# Altium PCB AWT25-000093_ZIM1.PcbDoc (part 4 of 4)
Units mm, origin at the board's own origin, x right, y up, seen from the top; angles counter-clockwise.
Board outline 210 x 108 mm, 6 copper layers (Top Layer, Mid-Layer 1, Internal Plane 2, Power, Mid-Layer 2, Bottom Layer); 303 components, 298 nets, 1319 pads, 1113 vias.
Unrouted connection lines stored in the file: 85.
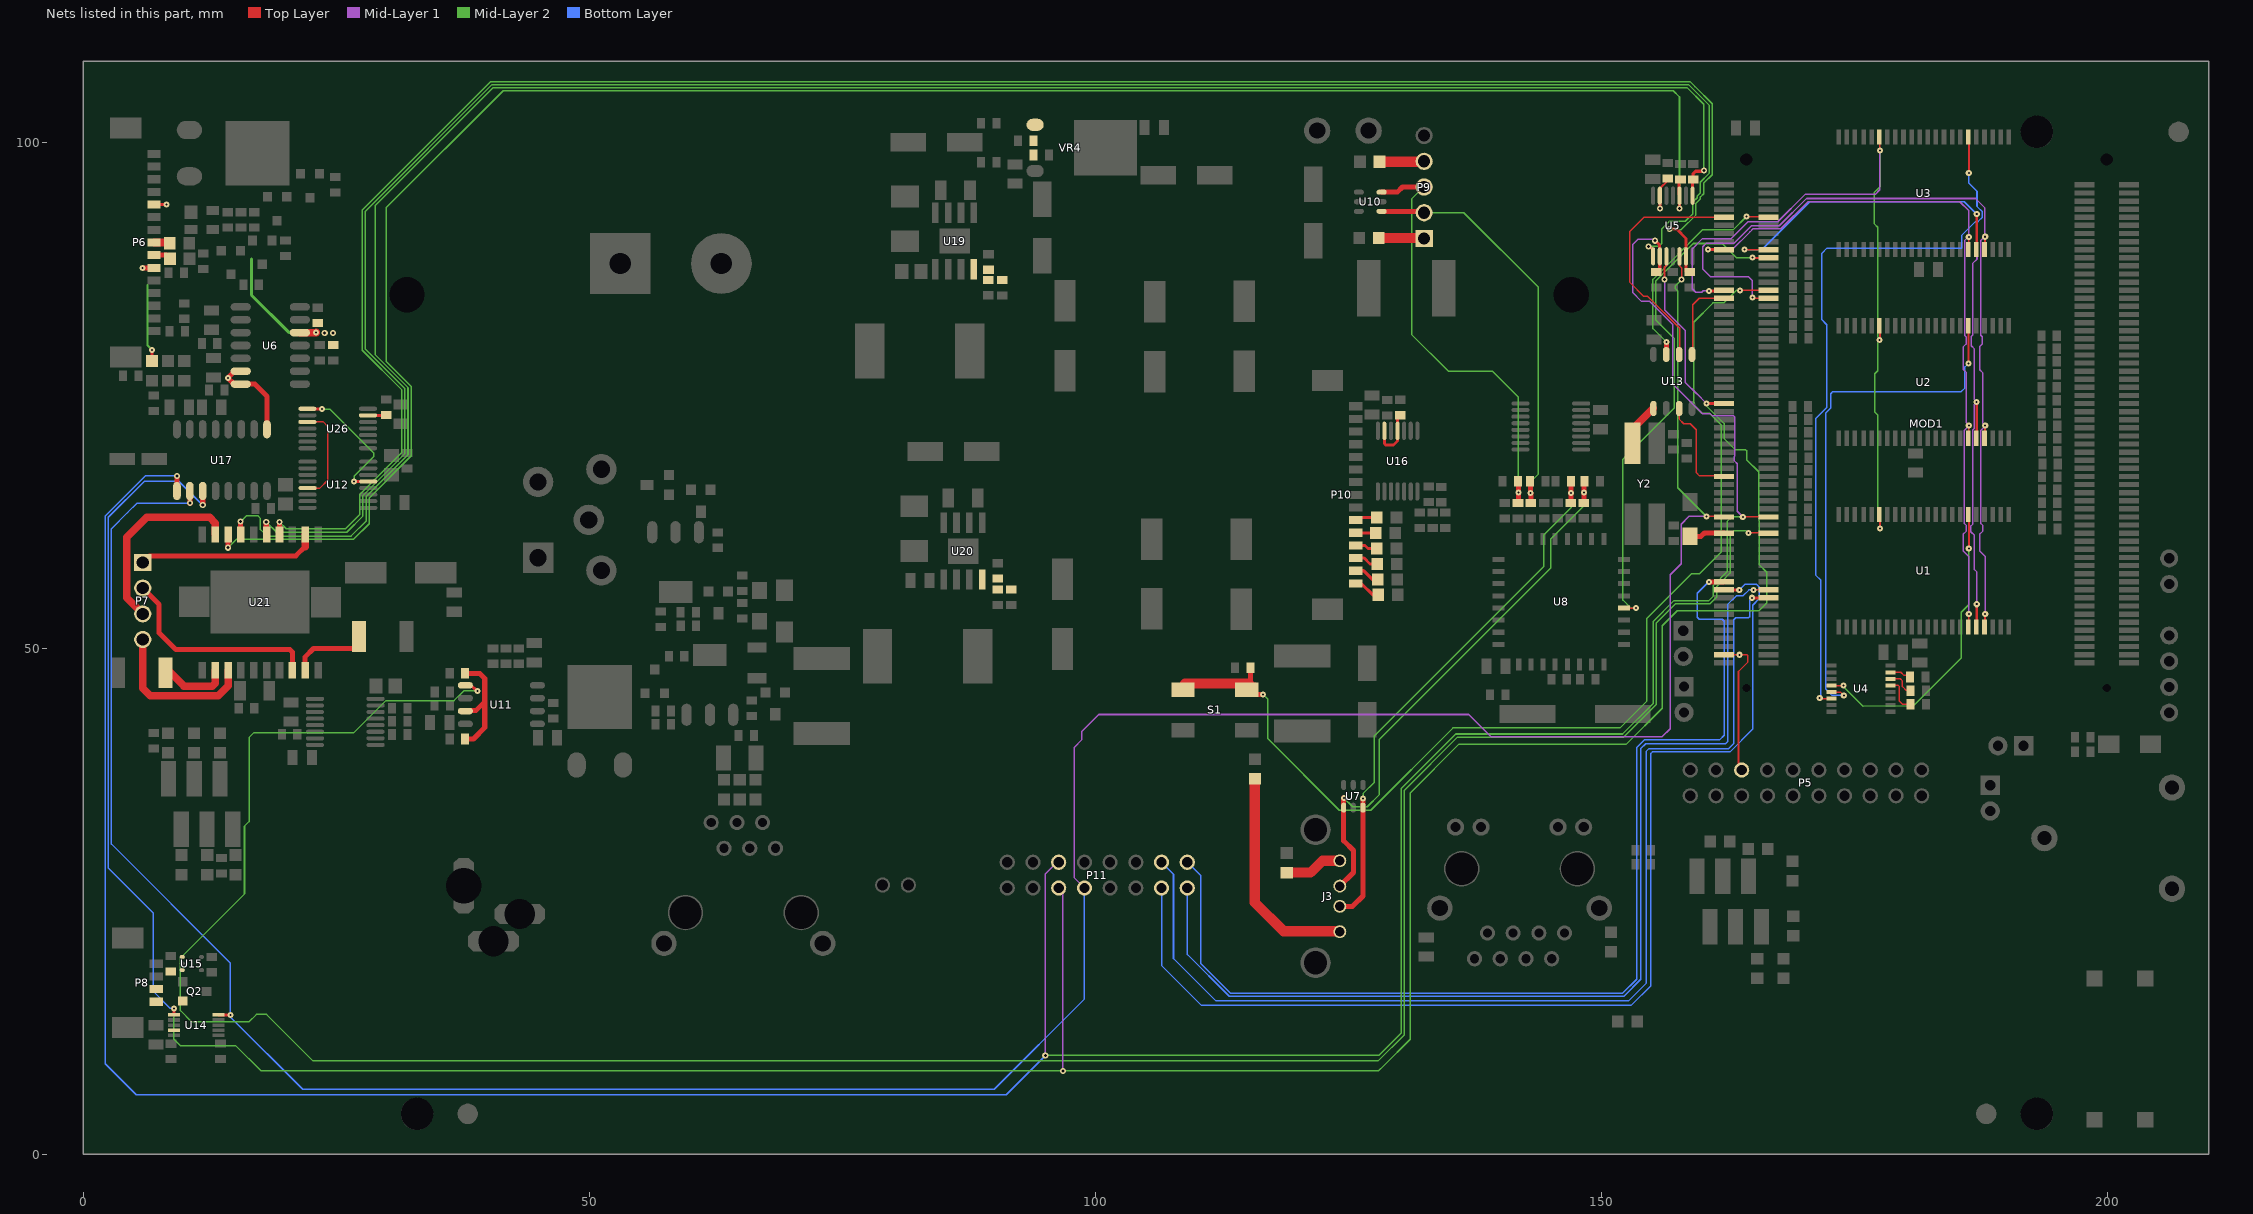
[diagram p8: the nets of this part, all layers, seen from the top]

## Via types
v1: diameter 0.6, hole 0.2, Top Layer to Bottom Layer, tented both sides, 894 vias
v2: diameter 0.6, hole 0.3, Top Layer to Bottom Layer, tented both sides, 199 vias
v3: diameter 0.6, hole 0.2, Top Layer to Bottom Layer, 18 vias
v4: diameter 0.4, hole 0.3, Top Layer to Bottom Layer, tented both sides, 2 vias

## Nets (pads, with @x,y where several pads share a name; then routed paths per layer and width w, separated by ;. In a path a pad name is that pad's centre, name@x,y a point inside that pad or via, vN(x,y) a via of type N, cw(c..) or ccw(c..) an arc to the next point about the centre after c; other vN are vias at no path point) (continued)
NetR84_2: R84.2 U16.11 U16.13 | length 5.4
  Top Layer w0.3: U16.13@128.55,71.475 128.55,70.2 128.675,70.075 129.45,70.075 129.85,70.475 U16.11@129.85,71.475 129.85,72.763 R84.2@130.1,73.013
NetR92_2: R92.2 U4.15 | length 2
  Top Layer w0.15: U4.15@178.529,47.621 179.562,47.621 179.874,47.309 R92.2@180.447,47.309
NetR93_2: R93.2 U4.13 | length 3.6
  Top Layer w0.15: U4.13@178.529,46.321 179.311,46.321 179.424,46.208 179.424,44.758 179.724,44.458 R93.2@180.511,44.458
NetR94_2: R94.2 U4.14 | length 2.7
  Top Layer w0.15: U4.14@178.529,46.971 179.512,46.971 179.724,46.759 179.724,46.208 180.099,45.833 R94.2@180.449,45.833
NetR102_2: R102.2 U26.13 | length 1.8
  Top Layer w0.3: U26.13@28.15,73 R102.2@29.912,73
NetR104_2: R104.2 U5.6 U21.4 | length 202.9
  Top Layer w0.3: v2(156.725,91.4) 157.425,91.4 158.35,90.475 U5.6@158.35,88.71 158.35,87.225 R104.2@158.325,87.2
  Top Layer w0.5: v2(19.4,62.475) 19.4,61.23 U21.4@19.405,61.225
  Mid-Layer 2 w0.15: v2(19.4,62.475) 20.075,61.8 25.926,61.8 27.35,63.224 27.35,65.2 31.5,69.35 31.5,75.5 27.575,79.425 27.575,93.275 40.275,105.975 158.724,105.975 159.224,105.475 ; v2@156.925,91.35 157.875,91.35 159.325,92.8 159.325,93.95 159.769,94.394 159.769,94.569 160.1,94.9 160.1,95.95 160.925,96.775 160.925,103.775 159.225,105.475
NetR107_1: R107.1 R108.2 R111.2 U19.4
NetR112_1: R112.1 R113.2 R114.1 U20.4
NetR115_2: R115.2 R118.1 U11.3 | length 11.7
  Top Layer w0.5: R118.1@37.747,41.034 38.56,41.034 39.685,42.159 39.685,44.708 ; R115.2@37.747,47.508 39.185,47.508 39.685,47.008 39.685,44.708 ; U11.3@37.76,43.859 37.769,43.859 38.835,43.859 39.685,44.708
NetR123_2: R123.2 R124.1 VR4.1
NetR125_2: R125.2 U5.8 U21.7 | length 196.6
  Top Layer w0.3: U5.8@159,94.9 159,96.288 R125.2@159,96.313 ; R125.2@159.05,96.288 159.05,96.875 159.287,97.112 v2@160.037,97.112
  Top Layer w0.5: v2(15.575,62.5) 15.575,61.245 U21.7@15.595,61.225
  Mid-Layer 2 w0.15: v2(15.575,62.5) 16.15,63.075 17.275,63.075 17.525,62.825 17.525,61.725 18.175,61.075 26.475,61.075 27.975,62.575 27.975,64.975 32.1,69.1 32.1,75.75 28.85,79 28.85,93.7 40.525,105.375 158.45,105.375 160.1,103.725 v2(160.1,97.175)
NetR126_2: R126.2 U5.10 U21.8 | length 196.8
  Top Layer w0.3: R126.2@157.65,96.275 157.65,94.825 U5.10@157.7,94.775 ; v2(157.7,93.425) U5.10@157.7,94.7
  Top Layer w0.5: v2(14.325,59.925) U21.8@14.325,61.225
  Mid-Layer 2 w0.15: v2(14.325,59.925) 15.175,60.775 26.75,60.775 28.275,62.3 28.275,64.85 32.425,69 32.425,75.85 29.95,78.325 29.95,93.525 41.5,105.075 157.075,105.075 157.7,104.45 v2(157.7,93.425)
NetR128_1: R128.1 U21.12 | length 6.5
  Top Layer w0.75: R128.1@8.525,47.7 9.975,46.25 12.775,46.25 13.055,46.53 U21.12@13.055,47.825
NetR129_1: R129.1 U21.19 | length 6.8
  Top Layer w0.5: U21.19@21.945,47.825 21.945,49.145 22.775,49.975 26.725,49.975 R129.1@26.95,50.2
NetR130_2: R130.2 U5.13 | length 3.2
  Top Layer w0.2: U5.13@155.775,94.675 155.775,94.7 155.775,95.425 156.525,96.175 R130.2@156.525,96.375
  Top Layer w0.3: U5.13@155.75,94.7 U5.13@155.775,94.675 ; v2(155.775,93.425) U5.13@155.775,94.625
NetU5_1: U5.1 U21.5 | length 203.4
  Top Layer w0.3: v2@154.55,89.725 154.625,89.725 154.725,89.725 155.1,89.35 U5.1@155.1,88.71
  Top Layer w0.5: v2(18.1,62.475) 18.1,61.26 U21.5@18.135,61.225
  Mid-Layer 2 w0.15: v2@18.075,62.5 v2(18.1,62.475) 19.125,61.45 26.05,61.45 27.65,63.05 27.65,65.075 31.8,69.225 31.8,75.625 27.875,79.55 27.875,93.15 40.4,105.675 158.6,105.675 160.625,103.65 160.625,96.899 159.75,96.024 159.75,94.974 159.45,94.674 159.45,94.499 159.025,94.074 159.025,92.924 158.276,92.175 156.725,92.175 155.95,91.4 155.95,90 155.65,89.7 v2(154.625,89.7)
NetU12_5: U12.5 U26.3 | length 9.8
  Top Layer w0.15: U26.3@22.16,72.35 23.75,72.35 24.175,71.925 24.175,66.6 23.395,65.82 U12.5@22.185,65.82
NetU12_13: U12.13 U26.1 | length 13.2
  Top Layer w0.3: U26.1@22.185,73.625 v1(23.625,73.625) ; v1(26.775,66.45) U12.13@28.025,66.45
  Mid-Layer 2 w0.15: v1(23.625,73.625) 24.375,73.625 28.725,69.275 28.725,68.925 26.775,66.975 v1(26.775,66.45)
NetU13_1: U13.1 Y2.1 | length 4.3
  Top Layer w0.75: Y2.1@153.055,70.228 153.055,71.614 U13.1@155.125,73.683
NetU14_9: U14.9 U15.1
OPTO_A: P8.1 Q2.2
OPTO_K: P8.2 R58.1 U15.3
PHA1: P7.1 U21.2 | length 17.9
  Top Layer w0.5: P7.1@5.9,58.475 6.55,59.125 21.025,59.125 21.945,60.045
  Top Layer w0.75: 21.945,60.045 U21.2@21.945,61.225
PHA2: P7.2 U21.18 | length 21
  Top Layer w0.5: P7.2@5.9,55.935 7.5,54.335 7.5,51.525 9.175,49.85 20.45,49.85 20.675,49.625 U21.18@20.675,47.825
  Bottom Layer w0.5: P7.2@5.9,55.96 P7.2@5.9,56.175
PHB1: P7.3 U21.9 | length 19.1
  Top Layer w0.75: P7.3@5.9,53.395 4.325,54.97 4.325,60.95 6.3,62.925 12.5,62.925 13.075,62.35 U21.9@13.075,61.25
PHB2: P7.4 U21.13 | length 15.5
  Top Layer w0.75: P7.4@5.9,50.855 5.9,46.025 6.625,45.3 13.35,45.3 14.325,46.275 U21.13@14.325,47.825
POWER_FAIL: MOD1.A34 U11.1 | length 258.7
  Top Layer w0.15: v1(164.5,61.4) 166.465,61.4 MOD1.A34@166.5,61.365
  Top Layer w0.3: U11.1@37.76,46.358 37.769,46.358 38.31,46.358 38.885,45.783 v1(38.96,45.783)
  Mid-Layer 2 w0.15: v1(38.96,45.783) 37.608,45.783 36.65,44.825 29.925,44.825 26.725,41.625 16.85,41.625 16.4,41.175 16.4,32.875 15.95,32.425 15.95,25.725 9.625,19.4 9.625,14.2 10.725,13.1 16.4,13.1 17.125,13.825 18.125,13.825 22.725,9.225 127.925,9.225 130.5,11.8 130.5,35.95 135.775,41.225 152.2,41.225 155.4,44.425 155.4,52.475 157.331,54.406 160.732,54.406 161.375,55.049 161.375,56.1 161.875,56.6 ; 161.875,56.601 162.7,57.426 162.7,61.225 163.1,61.625 164.275,61.625 v1(164.5,61.4)
POWER_GOOD: MOD1.A3 P5.15 | length 14.2
  Top Layer w0.15: MOD1.A3@162.115,49.35 v1(163.625,49.35) 164.36,49.35 164.453,49.257 164.453,48.632 163.528,47.708 163.528,38.276 P5.15@163.843,37.96
PRINTER_SCLK: MOD1.A65 P11.5 U5.3 U14.6 U17.3 | length 324.2
  Top Layer w0.2: v2(156.225,86.4) 156.225,87.637 156.4,87.812 U5.3@156.4,88.71
  Top Layer w0.3: U14.6@8.975,13.775 v1(8.975,14.425) ; v1(160.375,74.175) MOD1.A65@162.09,74.175
  Top Layer w0.5: U17.3@11.82,65.527 11.825,65.522 v2(11.825,64.125)
  Mid-Layer 1 w0.15: P11.5@96.377,26.313 96.8,25.89 v2(96.8,8.225) ; v2@156.225,86.35 156.225,83.425 158.275,81.375 158.275,76.25 159.4,75.125 159.425,75.125 v1(160.375,74.175)
  Mid-Layer 2 w0.15: v1(8.975,14.425) 8.975,11.374 9.599,10.75 15.074,10.75 17.574,8.25 96.8,8.25 127.974,8.25 128.462,8.738 ; 128.462,8.738 131.1,11.375 131.1,35.701 135.924,40.525 152.45,40.525 156,44.075 156,52.226 157.474,53.7 165.55,53.7 166.325,54.475 166.325,57.5 165.562,58.262 165.562,62.613 165.525,62.65 165.525,67.425 164.35,68.6 164.35,69.5 164.225,69.625 163.175,69.625 162.1,70.7 162.1,72.2 160.375,73.925 v1(160.375,74.175)
  Bottom Layer w0.15: v1(8.975,14.425) 8.6,14.425 6.95,16.075 6.95,23.825 2.5,28.275 2.5,62.925 6.075,66.5 9.45,66.5 v2(11.825,64.125)
PRINTER_SDI: MOD1.A38 P11.6 R127.2 U5.2 U17.1 | length 335.2
  Top Layer w0.15: v1(163.95,62.975) 166.49,62.975 MOD1.A38@166.5,62.965
  Top Layer w0.3: v2(155.3,90.25) 155.325,90.25 155.725,89.85 U5.2@155.725,88.725 ; R127.2@155.725,87.112 155.75,87.137 155.75,87.162 U5.2@155.75,88.71
  Top Layer w0.5: U17.1@9.28,65.527 9.3,65.547 v2(9.3,67.025)
  Mid-Layer 1 w0.15: v2(95.05,9.75) 95.05,27.7 96.203,28.853 P11.6@96.377,28.853 ; v2(155.3,90.25) 155.175,90.375 153.575,90.375 153.1,89.9 153.1,85.1 153.95,84.25 154.75,84.25 155.125,83.875 157.025,81.975 157.025,76.1 159.95,73.175 160.725,73.175 160.95,72.95 163.05,72.95 163.15,72.85 163.15,69 163.125,68.975 163.125,68.5 163.4,68.225 163.4,63.525 v1(163.95,62.975)
  Mid-Layer 2 w0.15: v2@94.975,9.775 95.05,9.775 128,9.775 130.2,11.975 130.2,36.125 135.6,41.525 152.076,41.525 155.1,44.549 155.1,52.65 157.156,54.706 160.607,54.706 161.05,55.149 161.05,56.2 162.4,57.55 162.4,57.748 162.4,61.175 162.4,62.525 162.85,62.975 v1(163.95,62.975) v1@163.975,62.975
  Bottom Layer w0.15: v2(9.3,67.025) 6.175,67.025 2.2,63.05 2.2,8.95 5.25,5.9 91.2,5.9 v2(95.05,9.75)
PRINTER_SDO: MOD1.A37 P11.7 U5.5 U14.5 U17.2 | length 295.4
  Top Layer w0.15: U5.5@157.7,88.71 157.7,87.787 157.9,87.587 v2(157.9,86.4) ; v1(160.35,63.025) 162.04,63.025 MOD1.A37@162.1,62.965
  Top Layer w0.3: U14.5@13.375,13.775 v1(14.55,13.775)
  Top Layer w0.5: v2(10.55,64.325) 10.55,64.302 U17.2@10.55,65.527 U17.2@10.55,65.85
  Mid-Layer 1 w0.15: P11.7@98.917,26.313 97.925,27.305 97.925,40.225 98.675,40.975 98.675,41.8 100.325,43.45 136.875,43.45 139.075,41.25 155.975,41.25 156.775,42.05 156.775,57.25 157.875,58.35 157.875,62.25 158.65,63.025 v1(160.35,63.025)
  Mid-Layer 2 w0.15: v2(157.9,86.4) 157.3,85.8 157.3,85.508 157.525,85.283 157.525,65.85 v1(160.35,63.025)
  Bottom Layer w0.15: 4.4,63.4 2.8,61.8 2.8,30.65 14.55,18.9 v1(14.55,13.775) 14.55,13.575 21.7,6.425 90,6.425 98.917,15.342 P11.7@98.917,26.313 ; 4.4,63.4 5.325,64.325 v2(10.55,64.325)
RS232_CTS: MOD1.A21 P11.16 | length 107
  Top Layer w0.5: v1(160.6,56.55) 162.025,56.55 MOD1.A21@162,56.575
  Bottom Layer w0.15: P11.16@109.1,28.85 110.425,27.525 110.425,18.831 113.34,15.916 152.082,15.916 153.475,17.309 153.475,40.2 154.209,40.934 161.653,40.934 162.128,41.409 162.128,52.653 161.932,52.85 159.65,52.85 159.45,53.05 159.45,55.425 160.587,56.562 v1@160.6,56.575
RS232_RTS: MOD1.A20 P11.15 | length 103.6
  Top Layer w0.15: v1@165.037,55.765 MOD1.A20@166.5,55.765
  Bottom Layer w0.15: P11.15@109.092,26.288 109.092,19.74 113.216,15.616 152.206,15.616 153.88,17.29 153.88,40.085 154.355,40.559 162.253,40.559 162.453,40.759 162.453,54.303 163.325,55.175 163.975,55.175 164.556,55.756 v1(165.028,55.756)
RS232_RXD: MOD1.A19 P11.13 | length 110.6
  Top Layer w0.3: MOD1.A19@162.228,55.756 v1(163.603,55.756)
  Bottom Layer w0.15: P11.13@106.537,26.313 106.537,18.646 110.442,14.741 152.956,14.741 154.855,16.641 154.855,39.585 155.03,39.76 162.678,39.76 164.928,42.009 164.928,54.253 165.575,54.9 165.575,56.05 165.3,56.325 164.172,56.325 v1(163.603,55.756) v1@163.503,55.756 ; v1@163.578,55.806 v1@163.578,55.853
RS232_TXD: MOD1.A18 P11.14 | length 108.2
  Top Layer w0.3: v1(164.861,54.981) 166.414,54.981 166.449,55.016 MOD1.A18@166.454,55.021
  Bottom Layer w0.15: P11.14@106.537,28.853 107.717,27.672 107.717,19.34 111.866,15.191 152.706,15.191 154.43,16.916 154.43,39.835 154.68,40.085 162.553,40.085 163.053,40.584 163.053,52.803 163.25,53 164.525,53 164.628,53.103 164.628,54.756 ; v1@164.853,54.981 v1(164.861,54.981)
RTC_CSBAR: MOD1.A47 U13.3 | length 10.3
  Top Layer w0.15: U13.3@157.729,73.619 U13.3@157.665,73.683 157.655,73.673 157.655,72.651 158.129,72.176 158.754,72.176 159.35,71.581 159.35,67.35 159.679,67.021 MOD1.A47@162.054,67.021
RTC_DATA_IO: MOD1.A91 U13.5 | length 8.3
  Top Layer w0.15: U13.5@159.005,79.017 159.005,83.93 159.65,84.575 162.09,84.575 MOD1.A91@162.1,84.565
RTC_READBAR: MOD1.A111 U13.6 | length 25
  Top Layer w0.15: U13.6@157.65,78.95 U13.6@157.688,78.988 ; U13.6@157.687,79.017 U13.6@157.688,78.988 ; U13.6@157.69,78.642 157.688,78.95 U13.6@157.688,78.988 ; MOD1.A111@161.908,92.475 MOD1.A111@161.998,92.565 ; MOD1.A111@162.054,92.621 162.049,92.616 MOD1.A111@161.998,92.565 ; MOD1.A111@162.1,92.565 MOD1.A111@161.998,92.565 ; U13.6@157.688,78.988 157.691,78.991 157.725,79.025 157.725,81.6 154.55,84.775 154.15,84.775 152.8,86.125 152.8,91.175 154.19,92.565 MOD1.A111@161.998,92.565
RTC_WRITEBAR: MOD1.A112 U13.7 | length 21.9
  Top Layer w0.15: v1(164.3,92.625) 166.45,92.625 MOD1.A112@166.454,92.621
  Top Layer w0.5: U13.7@156.395,79.017 156.395,80.239 v1(156.405,80.249)
  Mid-Layer 2 w0.15: v1(156.405,80.249) 155.075,81.579 155.075,86.425 160,91.35 163.025,91.35 v1(164.3,92.625)
SCON1: MOD1.A103 U1.39 U2.39 U3.39 | length 74.4
  Top Layer w0.15: U1.39@186.272,52.038 186.274,52.039 186.274,52.094 v1(186.274,53.377) ; U2.39@186.272,70.688 186.274,70.689 186.274,70.744 v1(186.274,71.995) ; U3.39@186.274,89.318 186.274,89.394 v1(186.274,90.639)
  Top Layer w0.3: v1(160.525,89.375) 161.9,89.375 MOD1.A103@161.903,89.372
  Mid-Layer 1 w0.15: v1(160.525,89.375) 162.906,89.375 164.65,91.119 164.65,91.125 164.95,91.425 167.7,91.425 170.385,94.11 185.393,94.11 186.274,93.23 v1(186.274,90.639) ; 185.842,71.538 185.842,62.318 186.045,62.115 186.045,61.581 185.715,61.251 185.715,59.625 186.273,59.067 v1(186.274,53.377) ; 185.893,71.589 v1@186.274,71.97 ; v1@186.248,90.664 185.859,90.275 185.859,80.911 186.011,80.758 186.011,80.047 185.715,79.751 185.715,77.549 186.037,77.228 186.037,72.275 v1@186.291,72.021
SCON2: MOD1.A92 U1.41 U2.41 U3.41 | length 86.1
  Top Layer w0.15: v1@164.96,84.565 MOD1.A92@166.5,84.565
  Top Layer w0.2: U1.41@187.872,52.038 187.877,52.043 187.899,52.065 187.899,52.094 v1(187.899,53.377) ; U2.41@187.872,70.688 187.877,70.693 187.899,70.715 187.899,70.744 v1(187.899,71.995) ; U3.41@187.872,89.338 187.874,89.34 187.874,89.394 v1(187.874,90.639)
  Mid-Layer 1 w0.15: v1(164.9,84.625) 164.9,86.3 164.52,86.681 160.771,86.681 160,87.451 160,89.65 160.372,90.022 163.103,90.022 164.806,91.725 167.556,91.725 170.251,94.421 186.947,94.421 187.872,93.496 v1@187.872,90.697 ; 187.467,71.538 187.467,62.318 187.671,62.115 187.671,61.581 187.34,61.251 187.34,59.625 187.899,59.067 v1(187.899,53.377) ; 187.518,71.589 v1@187.899,71.97 ; v1@187.848,90.664 187.459,90.275 187.459,80.911 187.611,80.758 187.611,80.047 187.357,79.793 187.357,77.507 187.637,77.228 187.637,72.275 v1@187.891,72.021 ; v1@187.892,90.657 v1@187.892,90.664
  other v1: 187.899,90.664
SCON3: MOD1.A104 U1.40 U2.40 U3.40 | length 76.7
  Top Layer w0.15: v1(164.099,89.369) MOD1.A104@166.454,89.365
  Top Layer w0.2: v1(187.061,54.342) 187.061,52.094 187.061,52.048 U1.40@187.072,52.038 ; v1@187.061,74.307 187.061,70.744 187.061,70.698 U2.40@187.072,70.688 ; v1(187.061,92.874) 187.061,89.394 187.061,89.348 U3.40@187.072,89.338
  Mid-Layer 1 w0.15: v1@187.048,74.345 186.832,74.561 186.832,79.564 186.528,79.869 186.528,80.784 186.655,80.911 186.655,87.997 187.086,88.429 v1@187.086,92.849 ; v1@187.061,74.307 186.807,74.053 186.807,71.69 186.68,71.563 186.68,62.267 186.477,62.064 186.477,61.505 186.832,61.149 186.832,57.771 187.073,57.53 v1@187.073,54.342 ; v1(187.061,92.874) v1@187.061,92.907
  Bottom Layer w0.15: v1(164.099,89.369) 165.827,89.369 170.568,94.11 185.825,94.11 v1(187.061,92.874)
  other v1: 187.036,74.332
SCON4: MOD1.A93 U1.17 U2.17 U3.17 | length 74.2
  Top Layer w0.15: U3.17@177.473,100.438 177.485,100.425 v1(177.485,99.173)
  Top Layer w0.2: U1.17@177.473,63.138 177.485,63.125 v1(177.511,61.835) ; v1@177.485,80.453 U2.17@177.485,81.775
  Top Layer w0.3: v1(160.6,85.3) 162.035,85.3 MOD1.A93@162.1,85.365
  Mid-Layer 1 w0.15: v1(160.6,85.3) 160.05,85.3 159.9,85.15 159.3,85.15 158.95,85.5 158.95,89.443 159.929,90.422 162.753,90.422 164.453,92.121 167.402,92.121 170.101,94.821 177.025,94.821 177.485,95.281 v1(177.485,99.173)
  Mid-Layer 2 w0.15: v1@177.485,80.428 177.282,80.225 177.282,77.405 176.977,77.101 176.977,73.341 177.282,73.037 177.282,63.893 177.536,63.639 v1@177.536,61.835 ; v1@177.511,80.504 177.282,80.733 177.282,91.579 176.952,91.909 176.952,95.033 177.511,95.592 v1@177.511,99.173
  other v1: 177.46,80.453
SERVICE: MOD1.A94 R36.2 S1.1 S1.2 | length 109.2
  Top Layer w0.15: v1@163.678,85.365 MOD1.A94@166.5,85.365
  Top Layer w0.5: 115.328,46.645 R36.2@115.328,48.083 ; S1.2@115.725,46.35 S1.2@115.75,46.375 ; S1.2@115.775,45.425 v1(116.575,45.425)
  Top Layer w1: S1.1@108.875,46.5 114.95,46.5 S1.2@115.175,46.5
  Mid-Layer 2 w0.15: v1(116.575,45.425) 117.05,44.95 117.05,41.05 124.1,34 127.2,34 135.325,42.125 151.827,42.125 154.475,44.773 154.475,52.95 158.879,57.354 159.679,57.354 161.8,59.475 161.8,72.075 160.675,73.2 159.9,73.2 159.104,73.996 159.104,82.204 161,84.1 162.079,84.1 163.327,85.348 v1(163.678,85.348)
SI: L13.2 P6.11 | length 8.9
  Top Layer w0.3: L13.2@6.8,78.365 6.825,78.39 v1(6.825,79.45) ; P6.11@7.025,93.825 v1(8.25,93.825)
  Mid-Layer 2 w0.2: 6.375,85.875 6.375,79.9 v1(6.825,79.45)
SRAM_0: U1.6 U4.4 | length 30.1
  Top Layer w0.15: U4.4@172.701,46.308 172.729,46.308 v1(173.9,46.308)
  Top Layer w0.2: U1.6@186.272,63.138 186.274,63.136 v1(186.274,59.854)
  Mid-Layer 2 w0.15: v1(173.9,46.308) 173.9,46.183 175.819,44.264 175.825,44.264 180.818,44.315 185.537,49.034 185.537,53.555 186.274,54.291 v1(186.274,59.854)
SRAM_1: U2.6 U4.5 | length 52.5
  Top Layer w0.15: U4.5@172.729,45.671 173.613,45.671 173.925,45.358 v1(173.925,45.333)
  Top Layer w0.2: v1(186.248,78.142) 186.248,81.764 U2.6@186.272,81.788
  Bottom Layer w0.15: v1(173.925,45.333) 172.776,45.333 172.146,45.963 172.146,73.242 172.634,73.73 172.634,75.145 172.837,75.348 185.537,75.348 185.893,75.704 185.893,77.786 v1(186.248,78.142)
SRAM_2: U3.6 U4.6 | length 72.4
  Top Layer w0.15: v1@171.626,45.008 172.729,45.008 U4.6@172.751,45.008
  Top Layer w0.2: U3.6@186.272,100.438 186.274,100.436 v1(186.274,96.938)
  Bottom Layer w0.15: v1(171.551,45.083) 171.643,45.176 171.643,56.73 171.135,57.238 171.135,72.656 172.253,73.773 172.253,81.952 171.745,82.46 171.745,88.988 172.278,89.521 185.562,89.521 185.562,90.766 186.934,92.137 187.188,92.137 187.594,92.544 187.594,93.128 187.086,93.636 187.086,95.135 186.274,95.947 v1(186.274,96.938)
STB1BAR: L11.2 P6.7 | length 1.7
  Top Layer w0.5: P6.7@7.025,88.825 8.235,88.825 L11.2@8.585,88.475
STB2BAR: L12.2 P6.8 | length 1.6
  Top Layer w0.75: P6.8@7.025,90.075 8.485,90.075 L12.2@8.56,90
SYSTEM_RUN_LED: D2.1 MOD1.A33 | length 3.5
  Top Layer w0.15: MOD1.A33@162.065,61.4 162.079,61.386 MOD1.A33@162.1,61.365
  Top Layer w0.2: MOD1.A33@162.09,61.375 MOD1.A33@162.1,61.365
  Top Layer w0.5: D2.1@158.75,61.05 159.829,61.05 160.164,61.386 MOD1.A33@162.079,61.386
T702_0V: L25.2 P10.2 | length 2.5
  Top Layer w0.3: P10.2@125.725,57.65 126.5,57.65 127.35,56.8 L25.2@127.885,56.8
T702_+VUN: L19.2 P10.1 | length 2.7
  Top Layer w0.3: P10.1@125.725,56.4 126.275,56.4 127.4,55.275 L19.2@127.935,55.275
T702_CSBAR: L21.2 P10.6 | length 2.2
  Top Layer w0.3: P10.6@125.725,62.65 125.975,62.9 L21.2@127.81,62.9
T702_SCLK: L23.2 P10.5 | length 2
  Top Layer w0.3: P10.5@125.725,61.4 125.75,61.375 L23.2@127.685,61.375
T702_SDI: L20.2 P10.3 | length 2.3
  Top Layer w0.3: P10.3@125.725,58.9 126.55,58.9 127.125,58.325 L20.2@127.835,58.325
T702_SDO: L22.2 P10.4 | length 2.2
  Top Layer w0.3: P10.4@125.725,60.15 126.625,60.15 126.925,59.85 L22.2@127.81,59.85
TM: C31.1 P6.6 R60.2 U6.5 | length 14.2
  Top Layer w0.5: v1(5.875,87.55) 7,87.55 P6.6@7.025,87.575
  Top Layer w0.75: U6.5@21.421,81.17 23,81.17 23.02,81.17 23.025,81.175 v1@23.05,81.2
  Mid-Layer 2 w0.3: 16.65,88.425 16.65,84.875 20.325,81.2 v1(23,81.2)
  other v2: 23.875,81.15 24.675,81.15
USB1_0V: J3.4 L8.2 | length 21.9
  Top Layer w1: L8.2@115.74,37.16 115.74,37.095 115.74,24.889 118.594,22.035 124.15,22.035 124.168,22.035 124.176,22.026 J3.4@124.213,21.989
USB1_+5V: J3.1 L7.2 | length 5.7
  Top Layer w1: L7.2@118.9,27.835 121.267,27.835 122.432,29 J3.1@124.15,29
USB1_DATA_N: J3.2 R37.2 R39.1 U7.4 | length 54.4
  Top Layer w0.3: R39.1@148.247,66.409 148.25,66.412 R39.1@148.313,66.475
  Top Layer w0.5: J3.2@124.15,26.5 125.488,27.838 125.488,30.011 124.525,30.974 U7.4@124.525,34.25 v1@124.525,35.211 ; R37.2@148.25,64.362 v1(148.25,65.4) R39.1@148.25,66.412 ; R39.1@148.3,66.488 R39.1@148.313,66.475
  Mid-Layer 2 w0.15: v1(124.538,35.211) 125.413,34.336 126.862,34.336 128.062,35.536 128.062,41.009 144.983,57.93 144.983,60.779 148.25,64.047 v1(148.25,65.4)
USB1_DATA_P: J3.3 R38.1 R88.2 U7.6 | length 53.1
  Top Layer w0.5: J3.3@124.15,24.5 125.399,24.5 126.425,25.526 U7.6@126.425,34.25 v1@126.425,35.161 ; R88.2@146.975,64.362 v1@146.975,65.325 ; v1@146.984,65.366 R38.1@146.984,66.497
  Mid-Layer 2 w0.15: v1(126.438,35.161) 126.438,35.636 127.562,36.76 127.562,41.359 144.308,58.105 144.308,61.204 146.984,63.88 146.984,65.35 v1@146.984,65.366
  other v1: 147,65.35
USB2_0V: L10.2 P9.4 | length 4.5
  Top Layer w1: L10.2@128.066,98.05 132.476,98.05 P9.4@132.576,98.05
USB2_+5V: L9.2 P9.1 | length 4.5
  Top Layer w1: L9.2@127.991,90.525 132.476,90.525 P9.1@132.526,90.525
USB2_DATA_N: P9.2 R41.2 R43.1 U10.4 | length 41.3
  Top Layer w0.3: R43.1@142.935,66.497 142.975,66.457 R43.1@143.022,66.41
  Top Layer w0.5: U10.4@128.276,93.15 P9.2@132.376,93.15 ; v1(142.975,65.35) R43.1@142.975,66.457 ; R41.2@143.022,64.334 v1@143.022,65.303
  Mid-Layer 2 w0.15: P9.2@132.476,93.015 136.391,93.015 143.758,85.648 143.758,67.203 142.975,66.42 v1(142.975,65.35)
USB2_DATA_P: P9.3 R40.2 R42.1 U10.6 | length 43.2
  Top Layer w0.5: U10.6@128.276,95.05 129.826,95.05 130.331,95.555 P9.3@132.476,95.555 ; R42.1@141.725,66.519 R42.1@141.747,66.497 ; 141.775,64.8 v1(141.775,65.375) 141.775,65.956
  Mid-Layer 2 w0.15: P9.3@132.476,95.555 132.421,95.555 131.236,94.371 131.236,80.999 134.885,77.35 139.234,77.35 141.775,74.809 v1(141.775,65.375)
USB_RESETBAR: MOD1.A102 U8.4 | length 50.4
  Top Layer w0.15: U8.4@152.222,53.972 152.227,53.967 v1(153.383,53.967)
  Top Layer w0.2: v1@164.91,88.565 MOD1.A102@166.5,88.565
  Mid-Layer 2 w0.15: v1(153.383,53.967) 152.894,53.967 152.112,54.75 152.112,68.659 157.202,73.748 157.202,80.573 155.375,82.4 155.375,86.301 159.049,89.975 161.925,89.975 163.328,88.572 v1(164.903,88.572)
VH_SENSE: U6.13 U6.14 U17.9 | length 9.4
  Top Layer w0.5: U6.13@15.579,77.36 14.96,77.36 v1(14.3,76.7) 14.91,76.09 U6.14@15.579,76.09 16.96,76.09 18.17,74.88 U17.9@18.17,71.623
pads on no net: D1.2 D1.3 D7.3 FID1.1 FID2.1 FID3.1 H1.1 H2.1 J5.7 J5.8 J5.15 J5.16 J7.5 J7.9 J7.10 MOD1.0 MOD1.1 MOD1.A4 MOD1.A11 MOD1.A12 MOD1.A14 MOD1.A15 MOD1.A16 MOD1.A17 MOD1.A22 MOD1.A23 MOD1.A26 MOD1.A32 MOD1.A35 MOD1.A36 MOD1.A43 MOD1.A52 MOD1.A53 MOD1.A57 MOD1.A64 MOD1.A66 MOD1.A96 MOD1.A97 MOD1.A98 MOD1.A99 MOD1.A100 MOD1.A105 MOD1.A106 MOD1.A107 MOD1.A108 MOD1.A109 MOD1.A110 MOD1.B1 MOD1.B3 MOD1.B4 MOD1.B5 MOD1.B6 MOD1.B7 MOD1.B9 MOD1.B10 MOD1.B11 MOD1.B12 MOD1.B13 MOD1.B15 MOD1.B16 MOD1.B17 MOD1.B18 MOD1.B19 MOD1.B20 MOD1.B21 MOD1.B22 MOD1.B23 MOD1.B24 MOD1.B25 MOD1.B26 MOD1.B27 MOD1.B28 MOD1.B29 MOD1.B30 MOD1.B31 MOD1.B32 MOD1.B33 MOD1.B34 MOD1.B35 MOD1.B36 MOD1.B37 MOD1.B38 MOD1.B39 MOD1.B41 MOD1.B42 MOD1.B43 MOD1.B44 MOD1.B45 MOD1.B46 MOD1.B47 MOD1.B48 MOD1.B49 MOD1.B50 MOD1.B51 MOD1.B52 MOD1.B53 MOD1.B54 MOD1.B55 MOD1.B56 MOD1.B57 MOD1.B58 MOD1.B59 MOD1.B60 MOD1.B61 MOD1.B62 MOD1.B63 MOD1.B64 MOD1.B65 MOD1.B73 MOD1.B74 MOD1.B75 MOD1.B76 MOD1.B77 MOD1.B78 MOD1.B79 MOD1.B97 MOD1.B98 MOD1.B99 MOD1.B100 MOD1.B101 MOD1.B102 MOD1.B103 MOD1.B104 MOD1.B105 MOD1.B106 MOD1.B107 MOD1.B108 MOD1.B109 MOD1.B110 MOD1.B111 MOD1.B112 MOD1.B113 MOD1.B114 MOD1.B115 MOD1.B116 MOD1.B117 MOD1.B118 MOD1.B119 P5.17 P5.19 P6.16 P6.17 P10.7 P10.8 P10.9 P10.10 P10.13 P10.14 P10.15 P10.16 P10.17 P11.12 P14.2 RL1.11 TOOL1.1 TOOL2.1 TOOL3.1 U4.7 U4.9 U4.10 U4.11 U4.12 U5.12 U7.1 U7.3 U8.5 U8.9 U8.10 U8.13 U8.14 U8.17 U8.18 U8.21 U8.22 U8.23 U8.24 U8.32 U9.4 U9.5 U9.13 U10.1 U10.3 U12.4 U12.12 U16.10 U16.12 U18.9 U18.10 U18.13 U18.15 U18.16 U19.2 U19.3 U19.5 U20.2 U20.3 U20.5 U21.17 U26.12 VR1.2 VR2.2 VR3.2 Y2.2 Y2.3
copper on no net: | length 6.4
  Top Layer w0.254: 65.241,1.775 ccw(c64.225,1.775) 65.241,1.775

## Polygon pours and split planes (outlines as drawn)
+VS on Top Layer "Top Layer-+VS 9" (solid, pour order 1030): 57.157,61.887 59.783,61.887 59.783,56.555 70.502,56.555 70.502,78.7 57.13,78.7
0VD on Top Layer "Top Layer-0VD 5" (solid, pour order 1037): 92.071,98.997 92.071,78.825 137.26,78.825 137.26,99.044 92.098,99.044
0VD on Top Layer "Top Layer-0VD 6" (solid, pour order 1038): 86.845,63.804 86.845,71 118.8,71 118.8,57.675 97.75,57.675 97.75,57 92.75,57 92.75,58.025 86.825,58.025
+5VD on Top Layer "Top Layer-+5VD 1" (solid, pour order 1036): 82.074,84.073 90.825,84.073 90.825,80.899 120.264,80.899 120.264,71.402 82.099,71.402 82.099,84.073
TM on Top Layer "Top Layer-TM" (solid, pour order 1035): 22.65,81.8 22.65,80.05 25.25,80.05 25.25,81.75
+VS on Top Layer "Top Layer-+VS 10" (solid, pour order 1034): 46.45,56.18 46.45,82.425 33.475,82.425 33.475,56.1
+VUN on Top Layer "Top Layer-+VUN 2" (solid, pour order 1033): 95.467,105.023 95.467,93.871 120.858,93.871 120.858,98.889 152.475,98.889 152.475,105.093 95.421,105.093
0VD on Top Layer "Top Layer-0VD 4" (solid, pour order 1032): 0.375,5.189 0.375,0.375 18.94,0.375 18.94,5.2
0VM on Top Layer "Top Layer-0VM 3" (solid, pour order 1031): 7.25,58.775 22.75,58.775 22.75,62.05 29.525,62.05 29.525,53.025 25.75,53.025 25.75,50.475 9.275,50.475 9.275,56.275 7.225,56.275 7.225,58.775
+VS on Top Layer "Top Layer-+VS 8" (solid, pour order 1029): 70.675,105.025 14,105.025 14,95.8 70.65,95.8
NetD5_2 on Top Layer "Top Layer-NetD5_2" (solid, pour order 1028): 47.906,48.269 47.906,64.269 54.231,64.269 54.231,48.344
+VUN on Top Layer "Top Layer-+VUN 1" (solid, pour order 1027): 136.585,67.053 136.585,99.719 138.06,99.719 138.06,67.053
NetBT1_1 on Top Layer "Top Layer-NetBT1_1" (solid, pour order 1026): 190.572,38.86 208.442,38.86 208.442,24.214 190.171,24.214 190.171,38.885
NetP3_1 on Top Layer "Top Layer-NetP3_1" (solid, pour order 1025): 197.269,42.409 197.269,39.26 190.696,39.26 190.696,42.434 197.269,42.434
+VS on Top Layer "Top Layer-+VS 7" (solid, pour order 1024): 20.432,102.094 27.688,102.094 27.688,95.745 20.365,95.745 20.365,102.094
+VS on Top Layer "Top Layer-+VS 6" (solid, pour order 1023): 75.925,47.808 70.502,47.808 70.502,104.943 75.62,104.943 75.62,47.833 70.502,47.833
+VS on Top Layer "Top Layer-+VS 5" (solid, pour order 1022): 83.748,104.943 89.397,104.943 89.397,97.02 83.748,97.02
+VS on Top Layer "Top Layer-+VS 4" (solid, pour order 1021): 85.123,92.021 85.123,94.271 83.099,94.271 83.099,96.045 71.776,96.045 71.776,104.943 83.748,104.943 83.748,98.62 85.973,98.62 85.973,91.971 85.148,91.971
0VD on Top Layer "Top Layer-0VD 3" (solid, pour order 1020): 89.933,88.497 86.273,88.497 86.273,96.795 92.971,96.795 92.971,88.497
0VD on Top Layer "Top Layer-0VD 2" (solid, pour order 1019): 64.503,53.581 64.503,49.482 70.177,49.482 70.177,53.531 64.528,53.531
NetC17_1 on Top Layer "Top Layer-NetC17_1" (solid, pour order 1018): 118.185,29.175 119.699,29.175 119.699,37.425 122.125,40.55 117.35,40.55 117.35,29.175
NetQ5_1 on Top Layer "Top Layer-NetQ5_1 1" (solid, pour order 1017): 19.35,95.525 25.575,95.525 25.575,93.15 19.35,93.15
NetQ5_1 on Top Layer "Top Layer-NetQ5_1" (solid, pour order 1016): 7.825,102.375 13.35,102.375 13.35,99.475 7.825,99.475
+VH on Top Layer "Top Layer-+VH" (solid, pour order 1015): 8.253,94.5 11.8,94.5 11.8,99.4 2.725,99.4 2.725,94.723 8.253,94.723
+3V3 on Top Layer "Top Layer-+3V3 2" (solid, pour order 1014): 107.267,48.882 107.267,47.258 114.341,47.258 114.341,48.907
ETH_CAN_SCREEN on Top Layer "Top Layer-ETH_CAN_SCREEN" (solid, pour order 1013): 131.961,26.188 131.961,22.889 151.781,22.889 151.781,26.088 131.961,26.088
+VS on Top Layer "Top Layer-+VS 3" (solid, pour order 1012): 86.648,61.279 86.648,70.977 73.476,70.977 73.476,65.578 83.798,65.578 83.798,63.654 85.898,63.654 85.898,61.279
+VUN on Top Layer "Top Layer-+VUN" (solid, pour order 1011): 137.835,99.594 137.835,77.05 152.481,77.05 152.481,99.769 138.007,99.769
+VS on Top Layer "Top Layer-+VS 2" (solid, pour order 1010): 27.363,77.575 27.363,94.471 46.425,94.471 46.425,77.625
+3V3 on Top Layer "Top Layer-+3V3 1" (solid, pour order 1009): 164.475,93.875 167.55,93.875 167.55,102.2 164.5,102.2 164.5,93.875
0VD on Top Layer "Top Layer-0VD 1" (solid, pour order 1008): 92.75,57 92.75,53.15 101.3,53.15 101.3,58.25 92.75,58.25
+3V3 on Top Layer "Top Layer-+3V3" (solid, pour order 1007): 83.1,54.925 83.1,43.175 107.317,43.175 107.317,48.8 116.94,48.8 116.94,52.325 118.9,52.325 118.9,57.105 101.894,57.105 101.894,52.781 89.297,52.781 89.297,54.931 83.1,54.931
0VM on Top Layer "Top Layer-0VM 2" (solid, pour order 1006): 28.2,62.075 28.2,49.6 33.6,49.6 36.425,52.425 36.425,54.475 30.875,54.475 30.875,62.05 30.85,62.075
0VM on Top Layer "Top Layer-0VM 1" (solid, pour order 1005): 9.475,62.2 12.25,62.2 12.25,60.35 9.475,60.35
0VM on Top Layer "Top Layer-0VM" (solid, pour order 1004): 10.525,47 12.375,47 12.375,49.575 10.45,49.575 10.45,47
+5VD on Top Layer "Top Layer-+5VD" (solid, pour order 1003): 156.525,86.05 159.775,86.05 159.775,85.225 156.525,85.225
+VS on Top Layer "Top Layer-+VS 1" (solid, pour order 1002): 39.064,61.9 46.65,61.9 46.65,51.475 39.05,51.475 39.05,61.842
+VS on Top Layer "Top Layer-+VS" (solid, pour order 1000): 40.875,53.574 37.191,48.786 37.191,47.557 27.433,47.557 25.715,45.325 18.671,45.325 17.7,46.587 17.7,49.821 18.546,49.821 18.546,47.298 23.774,47.298 23.774,49.724 24.645,50.856 33.631,50.856 36.454,54.525 40.775,54.525
NetD5_1 on Top Layer "Top Layer-NetD5_1" (solid, pour order 1039): 32.05,39.85 32.05,23.35 51.675,23.35 51.675,35.675 56.975,35.675 56.975,39.85
+5VD on Mid-Layer 1 "Mid-Layer 1-+5VD 2" (solid, pour order 1048): 136.16,88.584 136.16,71.352 116.29,71.352 116.29,88.747
+5VD on Mid-Layer 1 "Mid-Layer 1-+5VD 4" (solid, pour order 1053): 35.175,102.144 35.175,2.119 2.269,2.119 2.269,102.044 35.175,102.044
+5VD on Mid-Layer 1 "Mid-Layer 1-+5VD" (solid, pour order 1040): 82.85,28.7 57.45,28.7 57.45,34.975 28.525,34.975 28.525,23.075 82.85,23.075
+5VD on Mid-Layer 1 "Mid-Layer 1-+5VD 3" (solid, pour order 1051): 124.125,50.587 124.125,71.727 117.05,71.727 117.05,50.257 124.125,50.257
0VS on Mid-Layer 1 "Mid-Layer 1-0VS 3" (solid, pour order 1052): 136.385,89.047 119.789,89.047 119.789,105.468 136.334,105.468
+VUN on Mid-Layer 1 "Mid-Layer 1-+VUN 1" (solid, pour order 1050): 2.844,105.368 0.375,105.368 0.375,37.385 2.551,37.385 2.551,105.33
0VS on Mid-Layer 1 "Mid-Layer 1-0VS 2" (solid, pour order 1049): 117.45,34.511 117.45,16.341 151.856,16.341 151.856,34.39
+VUN on Mid-Layer 1 "Mid-Layer 1-+VUN" (solid, pour order 1047): 105.168,89.997 105.168,105.268 2.419,105.268 2.419,102.182 94.946,102.182 94.946,90.312 105.143,90.312
0VS on Mid-Layer 1 "Mid-Layer 1-0VS 1" (solid, pour order 1046): 209.625,105.468 209.625,17.19 206.417,17.19 206.417,105.418
0VM on Mid-Layer 1 "Mid-Layer 1-0VM 2" (solid, pour order 1045): 59.45,84.19 59.45,60.019 51.975,60.019 51.975,51.975 67.2,51.975 67.2,84.375 59.5,84.375
+5VD on Mid-Layer 1 "Mid-Layer 1-+5VD 1" (solid, pour order 1044): 93.107,76 89.488,76 67.055,92.305 25.138,92.305 25.138,101.894 94.025,101.894 94.025,76
0VM on Mid-Layer 1 "Mid-Layer 1-0VM 1" (solid, pour order 1043): 51.975,60.019 39.475,60.019 39.475,61.775 33.525,61.775 33.525,58.95 37.175,58.95 37.175,54.65 51.975,54.65
0VM on Mid-Layer 1 "Mid-Layer 1-0VM" (solid, pour order 1042): 37.175,54.65 37.175,51.975 51.975,51.975 51.975,54.65
0VS on Mid-Layer 1 "Mid-Layer 1-0VS" (solid, pour order 1041): 206.592,17.24 151.231,17.24 151.231,28.138 207.517,28.138 207.517,17.24
+5VD on Bottom Layer "Bottom Layer-+5VD" (solid, pour order 1056): 132,89 132,78.2 160,78.2 160,99.7 157.7,99.7 157.7,79.7 136.4,79.7 136.4,89
+VUN on Bottom Layer "Bottom Layer-+VUN" (solid, pour order 1055): 137.685,104.793 137.685,79.45 150.55,79.45 150.55,104.693 137.776,104.693
0VM on Bottom Layer "Bottom Layer-0VM" (solid, pour order 1054): 7.525,62.575 7.525,49.65 3.9,49.65 3.9,45.775 24.925,45.775 24.925,48.3 34.3,48.3 34.3,54.35 39.975,54.35 39.975,61.875 14.025,61.875 14.025,62.575
+3V3 on Power (split plane): 0.508,0.508 0.508,107.492 209.492,107.492 209.492,0.508
+VBAT on Power (split plane): 152.388,77.302 175.8,77.302 cw(c175.8,77.175) 175.89,77.265 179.12,74.035 179.12,74.036 cw(c179.03,73.945) 179.157,73.945 179.157,52.023 180.053,51.127 183.255,51.127 cw(c183.255,51) 183.345,51.09 193.948,40.487 202.715,40.487 203.715,41.487 203.715,42.681 202.49,43.906 194.02,43.906 cw(c194.02,44.034) 193.93,43.944 184.995,52.879 cw(c185,53.006) 184.873,53.001 184.87,53.004 cw(c184.96,53.094) 184.873,53.186 184.873,98.947 182.947,100.873 181.053,100.873 179.442,99.262 179.442,84.479 cw(c179.314,84.479) 179.363,84.361 176.156,83.032 cw(c176.107,83.15) 176.107,83.023 152.778,83.023 152.358,82.603 152.358,77.375
0VS on Internal Plane 2 (split plane): 135.598,89.079 135.553,89.035 124.695,89.035 124.522,89.207 124.482,89.224 124.472,89.247 124.139,89.58 124.139,99.177 124.111,99.246 124.099,99.274 123.601,99.772 123.504,99.812 120.207,99.812 119.387,100.632 119.387,104.318 120.132,105.063 135.598,105.063
0VM on Internal Plane 2 (split plane): 11.178,63.053 11.206,63.041 11.275,63.013 28.543,63.013 29.278,62.278 29.375,62.238 38.418,62.238 39.288,61.368 39.288,49.257 38.793,48.762 35.5,48.762 35.431,48.734 35.403,48.722 35.218,48.537 28.175,48.537 28.106,48.509 28.078,48.497 25.243,45.662 17.7,45.662 17.603,45.622 17.563,45.525 17.563,43.575 17.574,43.547 16.828,42.801 16.8,42.812 3.983,42.812 1.007,45.831 1.007,61.813 3.182,63.988 10.243,63.988
0VS on Internal Plane 2 (split plane): 152.293,38.278 152.293,38.135 152.293,12.279 47.17,12.279 47.17,38.947 151.624,38.947
0VD on Internal Plane 2 (split plane): 209.482,0.518 0.518,0.518 0.518,107.482 209.482,107.482

## Other copper
Top Layer:
  rectangle net 0VD: 86.845,60.854 88.022,63.804
  region net +VBAT: 153.6,81.125 155.825,81.125 155.825,78.25 153.6,78.25
  region net 0VD: 152.9,82.95 155.65,82.95 155.675,81.875 152.9,81.875
  region net +3V3: 155.925,86.05 155.95,85.125 154.25,85.125 154.25,86.025
  region net 0VD: 154.312,99.6 154.337,97.75 155.812,97.75 155.787,99.6
  region net 0VM: 15.8,44.65 14.2,44.65 14.2,43.35 15.8,43.35
  region net 0VM: 2.75,49.1 5.075,49.1 5.075,46.05 2.75,46.05
  region net 0VM: 23.6,49.575 23.4,49.575 23.05,49.575 22.525,49.075 22.525,47.025 23.6,47.025 23.6,48.9 24.025,49.375 24,49.575 23.8,49.575
  region net +5VD: 31.575,58.8 31.575,54.75 37.2,54.725 37.225,58.775
  region net 0VD: 132.711,81.349 132.711,79.425 134.26,79.425 134.26,80.299 134.685,80.299 134.66,81.349
  region net NetBT1_1: 190.471,41.634 190.471,38.46 190.471,37.635 187.122,37.66 187.122,41.634
  region net 0VD: 98.295,42.834 92.471,42.834 92.496,40.559 98.345,40.559
  region net 0VS: 150.231,20.615 150.231,18.64 151.681,18.64 151.681,20.615
  region net 0VS: 131.886,20.065 131.886,18.165 133.461,18.165 133.461,20.065
  region net NetQ3_3: 65.425,48.6 65.425,46.475 67.65,46.475 67.65,48.6
  region net +5VD: 117.575,49.7 117.275,49.7 117.275,52.05 123.675,52.05 123.675,49.7
  region net CASH_24V: 64.875,31.3 64.875,29.275 69.7,29.275 69.675,31.3
  region net NetD4_2: 60.263,48.3 61.338,44.05 62.588,44 63.588,48.275
  region net NetD4_1: 65.75,40.4 69.95,40.4 69.95,42.825 75.975,42.825 75.925,37.975 65.725,37.925
  region net NetQ3_1: 57.5,44.625 60.3,44.625 60.3,41.7 57.5,41.7
  region net 0VD: 65.287,51.45 65.287,49.5 67.862,49.5 67.862,51.45
  region net CASH_TEST: 68.9,42.825 65.525,42.825 65.525,44.15 68.9,44.15
  region net NetC24_1: 139.825,45.975 139.8,42.725 145.4,42.725 145.4,45.975
  region net 0VD: 27.275,64.15 27.275,63.512 29.125,63.512 29.125,64.15
  region net 0VD: 21.15,64.15 21.15,63.4 23.9,63.4 23.9,64.15
  region net 0VD: 31.075,66.1 31.075,62.675 33.35,62.675 33.35,66.1
  region net +3V3: 31.475,68.15 31.475,66.4 33.375,66.4 33.375,68.15
  region net +3V3: 17.45,64.35 17.45,63.25 15.2,63.25 15.2,64.35
  region net 0VD: 21.25,69.95 21.25,68.225 23.1,68.225 23.1,69.95
  region net +3V3: 13.175,74.025 13.15,73.025 12.675,73.025 12.675,70.675 14.8,70.675 14.775,73.025 14.15,73.025 14.125,74
  region net 0VD: 5.6,70.275 5.6,67.325 2.275,67.35 2.325,68.8 2.325,70.25
  region net +3V3: 27.225,73.45 29.075,73.45 29.075,73.975 32.3,74 32.3,76.25 27.225,76.25
  region net 0VD: 181.879,90.766 182.641,90.766 182.641,94.322 181.879,94.322
  region net 0VD: 181.067,95.224 181.803,95.224 181.803,98.754 181.067,98.754
  region net 0VD: 181.854,52.996 182.616,52.996 182.616,56.552 181.854,56.552
  region net 0VD: 181.016,76.466 181.752,76.466 181.752,79.996 181.016,79.996
  region net 0VD: 181.854,71.614 182.616,71.614 182.616,75.17 181.854,75.17
  region net 0VD: 181.117,59.6 181.117,57.822 181.778,57.822 181.778,61.353 181.117,61.353
  region net +VH: 5.3,83.1 9.2,83.1 9.2,79.975 6.325,79.975 5.3,80.6
  region net 0VD: 5.3,83.4 8.9,83.4 8.9,85.6 5.3,85.6
  region net +VH: 11.592,92.146 9.118,92.146 9.1,95 10.6,95 11.6,95
  region net 0VD: 5,96.8 8.9,96.8 8.9,94.6 5,94.6
  region net NetD1_4: 12,94.4 12,92.5 16.2,92.5 16.2,94.4
  region net +VH: 2.7,95.1 2.725,87.925 2.725,80.65 5.3,80.6 5.3,83.1 5.1,83.1 5.1,91 5.1,94 4.85,94 4.85,95.125
  region net +5VD: 18.1,90.8 18.1,88.9 19.1,88.9 19.1,89.4 21.5,89.4 21.5,90.8
  region net 0VD: 8.9,84.5 13,84.5 13,84.9 13.9,84.9 13.9,82.8 10.8,82.8 10.8,83.4 8.9,83.4
  region net 0VD: 9.825,74.675 12.875,74.7 12.875,73.2 12.425,73.175 12.4,69.825 11.275,69.825 11.275,72.925 9.825,72.925
  region net +5VD: 14.375,76.05 13.55,76.05 13.55,74.925 14.3,74.925 14.3,74.5 16.3,74.5 16.3,75.475 14.4,75.475
  region net NetR52_2: 8.3,11.95 8.3,10.525 9.575,10.525 9.575,11.95
  region net NetR57_1: 12.775,11.95 12.775,10.525 14.1,10.525 14.1,11.95
  region net 0VD: 5.55,11.2 5.55,9.475 7.925,9.475 7.925,11.2
  region net +3V3: 6.275,12.25 6.275,14.225 8.075,14.225 8.075,12.15 6.275,12.15
  region net 0VD: 139.4,44.875 139.4,49.8 137.35,49.8 137.35,44.875
  region net NetC17_1: 128.375,45.35 128.375,40.55 117.35,40.55 117.375,45.35
  region net NetC22_1: 120.576,91.975 126.726,91.975 126.726,88.975 128.426,88.975 128.426,82.45 120.576,82.475
  region net +5VD: 132.101,88.8 132.101,82.275 135.701,82.275 135.701,88.8
  region net 0VD: 120.476,98.925 120.476,93.925 122.876,93.925 122.851,96.475 126.751,96.475 126.751,98.925
  region net NetQ9_2: 56.855,56.58 58.03,60.879 58.98,60.879 60.154,56.605
  region net NetC55_1: 63.154,56.131 65.928,56.131 65.928,57.005 70.227,57.005 70.227,53.981 63.604,53.981 63.654,54.656 63.154,54.656
  region net NetR107_1: 87.273,85.698 87.273,87.123 87.273,88.497 88.422,88.522 88.422,88.147 91.346,88.147 91.346,85.698
  region net 0VD: 84.623,88.972 79.849,88.972 79.849,91.596 84.698,91.596
  region net NetC44_2: 84.523,86.398 82.324,86.398 82.299,88.447 84.523,88.447
  region net NetC44_1: 81.749,88.097 81.749,76.7 75.9,76.7 75.9,88.097
  region net NetC44_1: 84.498,92.021 79.749,92.021 79.749,95.795 82.799,95.795 82.799,94.021 84.498,94.021
  region net NetC44_1: 75.9,88.097 75.9,95.82 80.074,95.82 80.149,92.021 79.55,92.021 79.55,88.097
  region net NetR123_2: 93.196,101.769 93.196,98.17 94.746,98.17 94.746,101.294 94.871,101.769
  region net NetC63_1: 89.822,98.545 89.822,97.02 91.321,97.02 92.821,97.02 92.821,98.545
  region net 0VD: 92.821,101.594 92.821,98.695 90.872,98.695 90.872,101.594
  region net 0VD: 84.473,101.144 89.672,101.144 89.672,98.795 84.473,98.795
  region net +VUN: 105.368,102.194 105.368,100.669 103.618,100.669 103.743,102.194
  region net 0VD: 106.243,102.169 108.117,102.169 108.117,100.669 106.243,100.669
  region net +VUN: 97.895,102.169 105.393,102.144 105.393,97.695 107.967,97.695 107.992,95.795 97.895,95.795
  region net 0VD: 109.917,94.596 114.765,94.596 114.765,98.945 109.917,98.945
  region net 0VD: 109.917,94.628 109.917,93.121 114.765,93.146 114.761,94.617
  region net NetC63_1: 93.196,97.77 93.196,92.621 95.67,92.621 95.645,97.77
  region net 0VD: 88.45,61.025 80.624,61.029 80.624,58.28 88.45,58.275
  region net NetC56_1: 83.648,65.328 83.648,63.379 85.348,63.379 85.348,61.279 83.648,61.279 80.274,61.279 80.274,58.03 82.549,58.03 82.549,55.656 82.549,45.458 76.35,45.458 76.35,65.328
  region net +5VD: 88.672,85.248 88.672,84.448 91.022,84.448 91.022,85.248
  region net 0VD: 113.091,40.185 116.44,40.185 116.44,42.734 113.091,42.734
  region net 0VD: 106.967,40.385 106.967,42.659 110.767,42.659 110.767,40.385
  region net NetR112_1: 88.422,57.805 88.422,55.206 92.346,55.206 92.346,57.355 89.247,57.355 89.247,57.805
  region net NetC56_2: 85.323,57.78 85.348,55.756 82.974,55.756 82.974,57.78
  region net +VBAT: 197.844,42.859 197.869,39.235 202.168,39.26 202.168,42.859
  region net +3V3: 203.043,39.485 203.043,44.608 207.392,44.608 207.392,39.485
  region net +3V3: 181.573,47.708 181.573,43.884 183.773,43.884 183.773,47.708
  region net 0VD: 35.361,44.908 35.361,41.584 36.635,41.584 36.635,40.485 33.461,40.485 33.486,43.634 34.211,43.634 34.211,44.908
  region net NetC62_1: 35.761,46.308 35.761,43.534 35.611,43.534 35.611,41.834 36.76,41.834 36.76,44.434 38.56,44.434 38.56,45.533 36.785,45.533 36.785,46.308
  region net +3V3: 43.984,47.508 43.984,46.033 46.408,46.008 46.408,47.483
  region net 0VS: 150.081,14.041 150.081,12.417 152.156,12.417 152.131,14.041
  region net 0VD: 152.956,14.016 152.956,12.392 154.905,12.392 154.905,14.016
  region net +3V3: 139.909,49.082 143.358,49.082 143.358,46.858 139.909,46.858
  region net 0VD: 47.283,41.859 48.283,41.859 48.283,40.385 47.308,40.385
  region net 0VD: 54.331,52.956 54.331,53.931 56.28,53.931 56.28,52.981
  region net 0VD: 163.925,101.175 163.925,100.45 161.9,100.475 161.9,102.175 163.9,102.175
  region net NetC37_2: 158.979,69.202 157.655,69.202 157.655,70.077 156.555,70.077 156.58,68.177 158.979,68.177
  region net +VS: 49.732,81.224 49.732,94.221 39.285,94.221 39.31,102.094 56.555,102.094 56.605,81.224
  region net NetQ8_3: 197.269,18.64 205.067,18.64 205.017,15.741 197.269,15.741
  region net NetQ9_1: 197.469,4.719 197.469,2.094 205.092,2.119 205.092,4.744
  region net NetQ9_1: 60.279,64.278 60.279,60.204 61.504,60.229 61.504,60.754 63.529,60.754 63.529,64.278
  region net 0VD: 55.475,68.1 55.5,66.025 57.975,66.025 57.975,68.075
  region net +VS: 48,66 48,99.525 56.6,99.775 56.575,71.175 54.25,71.225 54.25,66
  region net +VS: 56.05,99.875 39.725,99.8 39.675,51.95 42.675,51.85 42.85,94.825 56.225,94.85
  region net +3V3: 154,93.75 155.3,93.75 155.325,95.85 155.8,95.85 155.8,96.85 154,96.85
  region net +5VD: 157.275,97.45 157.275,99.75 159.575,99.725 159.575,97.425
  region net 0VD: 30.675,72.65 30.7,72.875 33.25,72.875 33.25,71.275 31.925,71.275 31.925,71.675 30.7,71.7
  text "AWT25-000093 GTL REV1" at 71.975,3.15 h1.02
  text "C  2006" at 63.92,1.267 h1.02
  text "AVERY WEIGH-TRONIX" at 44.565,1.242 h1.02
Mid-Layer 1:
  region net 0VD: 59.475,91.5 59.475,84.025 67.175,84.025 67.175,91.5
  region net 0VS: 135.835,105.468 209.6,105.475 209.625,103.075 135.785,103.068
  region net +VUN: 12.173,37.401 13.347,37.376 13.372,39.525 2.525,39.525 2.525,37.401
  region net +5VD: 85.25,79.125 117.14,79.05 117.14,68.977 85.25,69.05
  text "AWT25-000093 G1 REV1" at 94.225,3.2 h1.02
Mid-Layer 2:
  region net NetQ5_1: 7.9,102.525 26.25,102.525 26.25,94.825 25,93.325 24.5,92.8 24.3,92.7 20.2,92.7 20.175,98.6 7.9,98.6
  text "AWT25-000093 G4 REV1" at 116.5,1.7 h1.02
Bottom Layer:
  text "AWT25-000093 GBL REV1" at 158.77,3.23 h1.02
Power (plane layer: these items are gaps in the copper):
  lines w0.254: 179,52 180,51 182.048,51 183.255,51 193.895,40.36 202.768,40.36 203.843,41.434 203.843,42.734 202.543,44.034 194.02,44.034 184.96,53.094 ; 179,99 181,101 183,101 185,99 185,53.006 ; 179.03,51.97 179.03,73.945 175.8,77.175 153.631,77.175 152.303,77.175 152.231,77.35 152.231,79.225 152.231,82.656 152.725,83.15 176.107,83.15 179.314,84.479 179.314,99.314
  text "AWT25-000093 G3 REV1" at 116.525,3.2 h1.02
Internal Plane 2 (plane layer: these items are gaps in the copper):
  lines w0.127: 16.8,42.675 17.7,43.575
  lines w0.254: 0.87,45.73 0.87,61.87 3.125,64.125 8.25,64.125 10.125,64.125 10.3,64.125 11.275,63.15 12.35,63.15 13.65,63.15 28.6,63.15 29.375,62.375 30.15,62.375 ; 0.87,45.775 3.925,42.675 16.8,42.675 ; 17.7,43.575 17.7,45.525 25.3,45.525 28.175,48.4 35.275,48.4 35.5,48.625 38.3,48.625 ; 30.125,62.375 35.15,62.375 ; 34.925,62.375 38.475,62.375 39.425,61.425 39.425,49.2 38.85,48.625 38.3,48.625 ; 38.225,48.625 38.3,48.625 ; 123.975,89.55 124.375,89.15 ; 124.002,89.523 124.002,99.177 123.504,99.675 120.15,99.675 119.25,100.575 119.25,104.375 120.075,105.2 124.375,105.2 127.075,105.2 ; 124.425,89.11 124.638,88.897 135.61,88.897 135.735,89.022 135.735,105.2 127.019,105.2 ; 47.033,12.142 47.033,39.085 151.381,39.085 151.681,39.085 152.431,38.335 152.431,38.135 152.431,12.142 47.033,12.142
  text "AWT25-000093 G2 REV1" at 94.175,1.6 h1.02

## Silkscreen, mask and mechanical layers (free items; w line width, h text height)
Top Paste:
  text "AWT25-000093 TOP PASTE REV1" at 91.332,110.197 h1.52
Top Solder:
  text "AWT25-000093 GTS REV1" at 72.022,1.623 h1.02
Bottom Solder:
  text "AWT25-000093 GBS REV1" at 158.747,1.694 h1.02
Board Profile:
  the board outline again, w0.05
Machining:
  lines w0.254: 32.975,86.675 39.225,92.925 39.225,106.075 44,110.85 50.05,110.85 ; 55.825,-10.45 46.875,-10.45 34.225,2.2 ; 132.95,111.05 136.275,111.05 140.65,106.675 140.65,92.075 145.925,86.8 145.925,86.75 ; 162.475,-0.8 162.475,24.975 210.5,24.975 ; 34.225,2.2 34.225,2.2
  text "2 MOUNTING HOLES 3.5 mm DIA." at 51.4,109.4 h3
  text "3 TOOLING HOLES 3.2 mm DIA." at 58.025,-11.725 h3
Drill Drawing:
  text ".Legend" at 216.275,2.525 h1.52

## Dimensions
210.475,-0.5 to 210.5,24.975 on Machining
210.475,-0.5 to 162.475,-0.725 on Machining
32,84.9 to 193,101 on Machining
33,4 to 32,84.9 on Machining
147,84.9 to 193,101 on Machining
32,84.9 to 147,84.9 on Machining
0,0 to 32.975,4 on Machining
0,108 to 210,108 on Machining
0,108 to 0,0 on Machining
32,84.9 to 0,108 on Machining

## Text inside footprints (layer, text, board x,y; h text height)
C9: Comp Silk "+" at 33.407,55.545 h1.5 r270
C17: Comp Silk "+" at 125.465,44.311 h1.5 r180
C22: Comp Silk "+" at 120.129,91.628 h1.5 r180
C34: Comp Silk "+" at 6.078,67.686 h1.5 r270
C50: Comp Silk "+" at 82.901,101.366 h1.5 r90
C52: Comp Silk "+" at 103.963,78.742 h1.5 r180
C53: Comp Silk "+" at 95.09,78.842 h1.5 r180
C54: Comp Silk "+" at 112.811,78.792 h1.5 r180
C55: Comp Silk "+" at 66.701,54.435 h2
C57: Comp Silk "+" at 84.576,70.824 h1.5 r90
C59: Comp Silk "+" at 94.845,51.343 h1.5 r180
C60: Comp Silk "+" at 112.511,55.273 h1.5 r180
C61: Comp Silk "+" at 103.663,55.298 h1.5 r180
C63: Comp Silk "+" at 96.143,92.968 h1.5
C66: Comp Silk "+" at 107.595,98.117 h1.5 r90
MOD1: Top Overlay "A119" at 161.35,101.765 h1.5 r270; Top Overlay "A120" at 165.75,101.765 h1.5 r270; Top Overlay "A1" at 161.35,47.565 h1.5 r270; Top Overlay "A2" at 165.75,47.565 h1.5 r270; Top Overlay "B119" at 196.95,101.765 h1.5 r270; Top Overlay "B120" at 201.35,101.765 h1.5 r270; Top Overlay "B1" at 196.95,47.565 h1.5 r270; Top Overlay "B2" at 201.35,47.565 h1.5 r270